# Altium PCB WRIP.PcbDoc
Units mm, origin at the board's own origin, x right, y up, seen from the top; angles counter-clockwise.
Board outline 36.1 x 23.75 mm, 2 copper layers (F.Cu, B.Cu), stack 2.683 mm thick; 24 components, 17 nets, 90 pads, 21 vias.
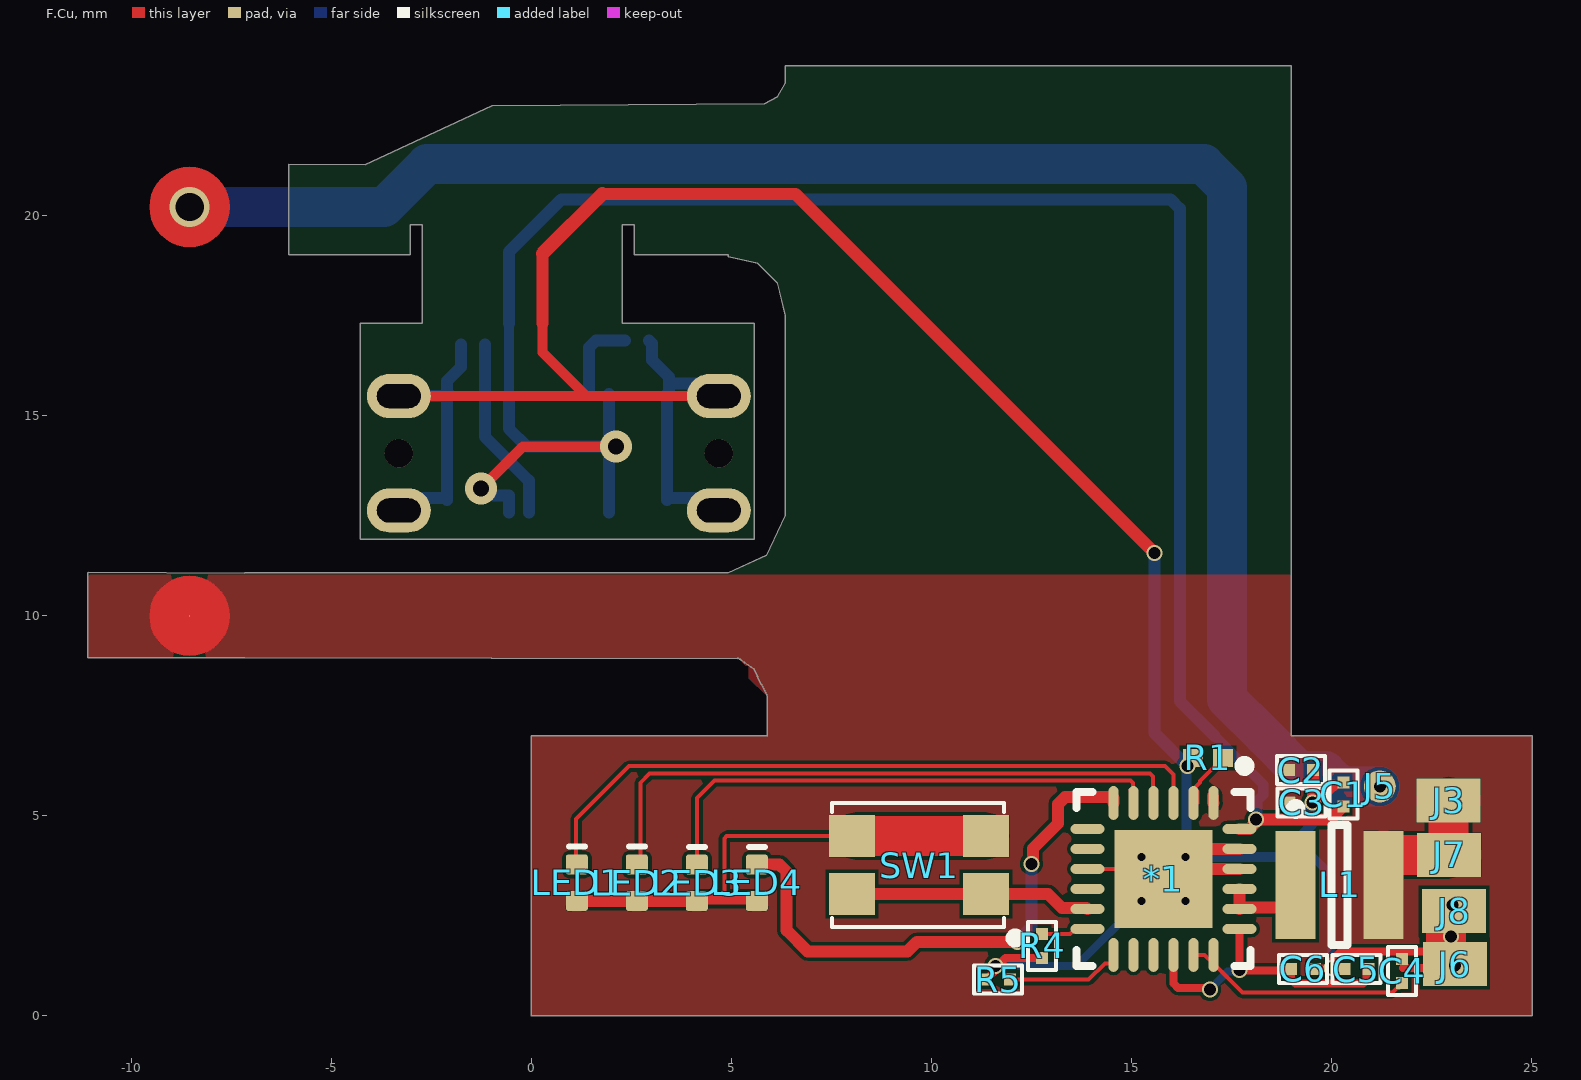
[diagram p0: F.Cu view]
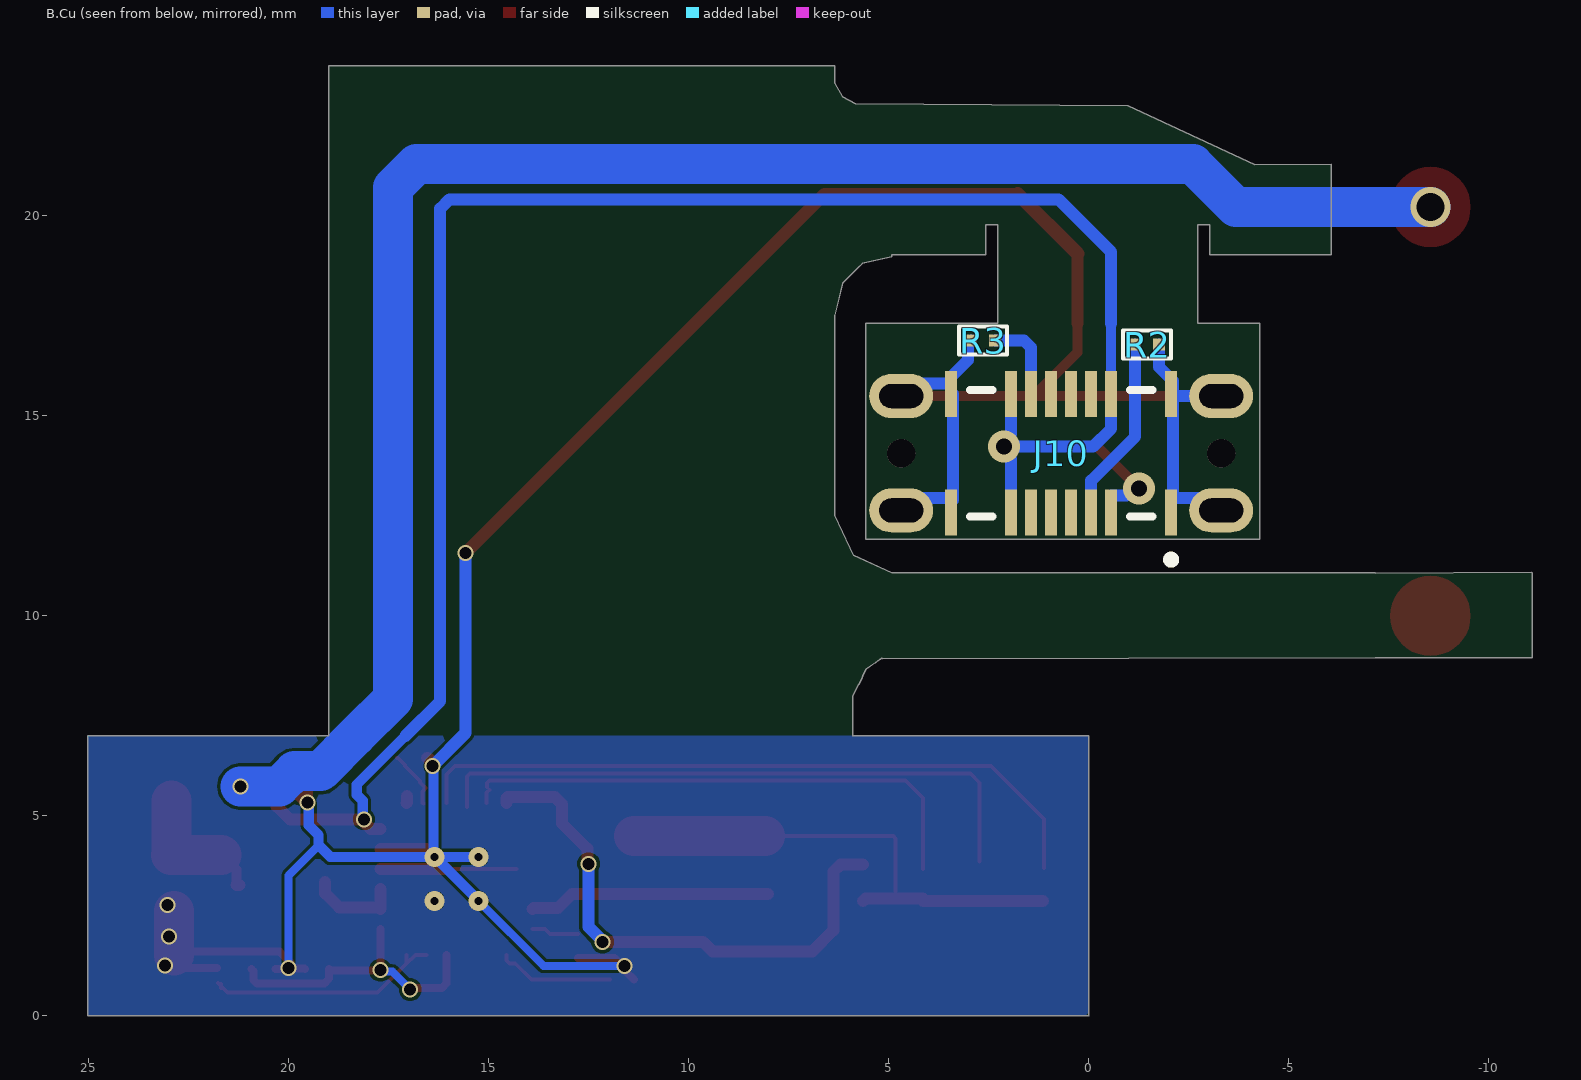
[diagram p1: B.Cu view, seen from below]
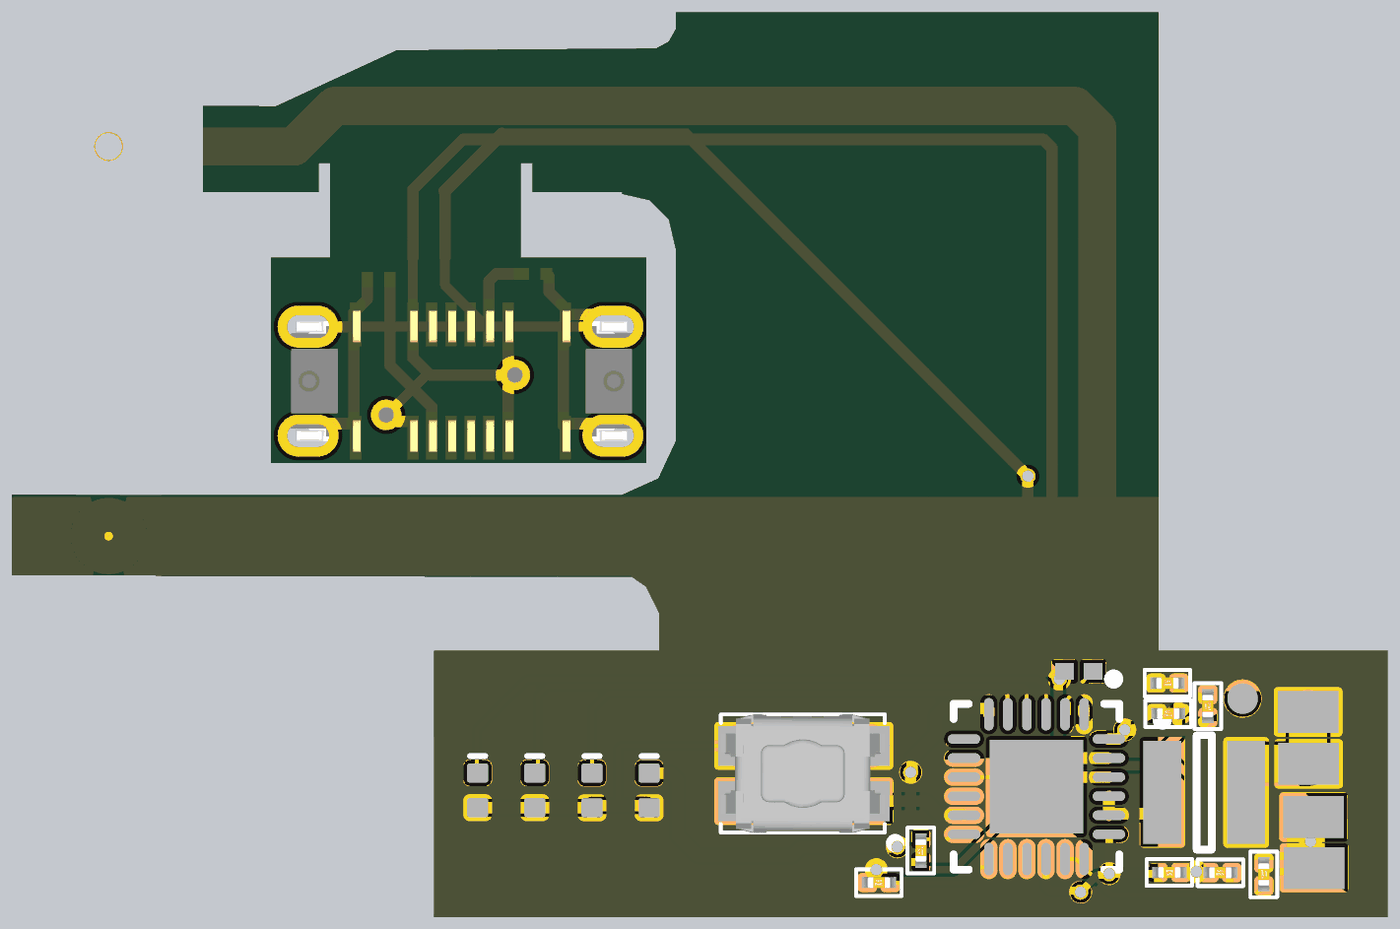
[diagram p2: 3D render of the assembled board from above, using the file's embedded part models]
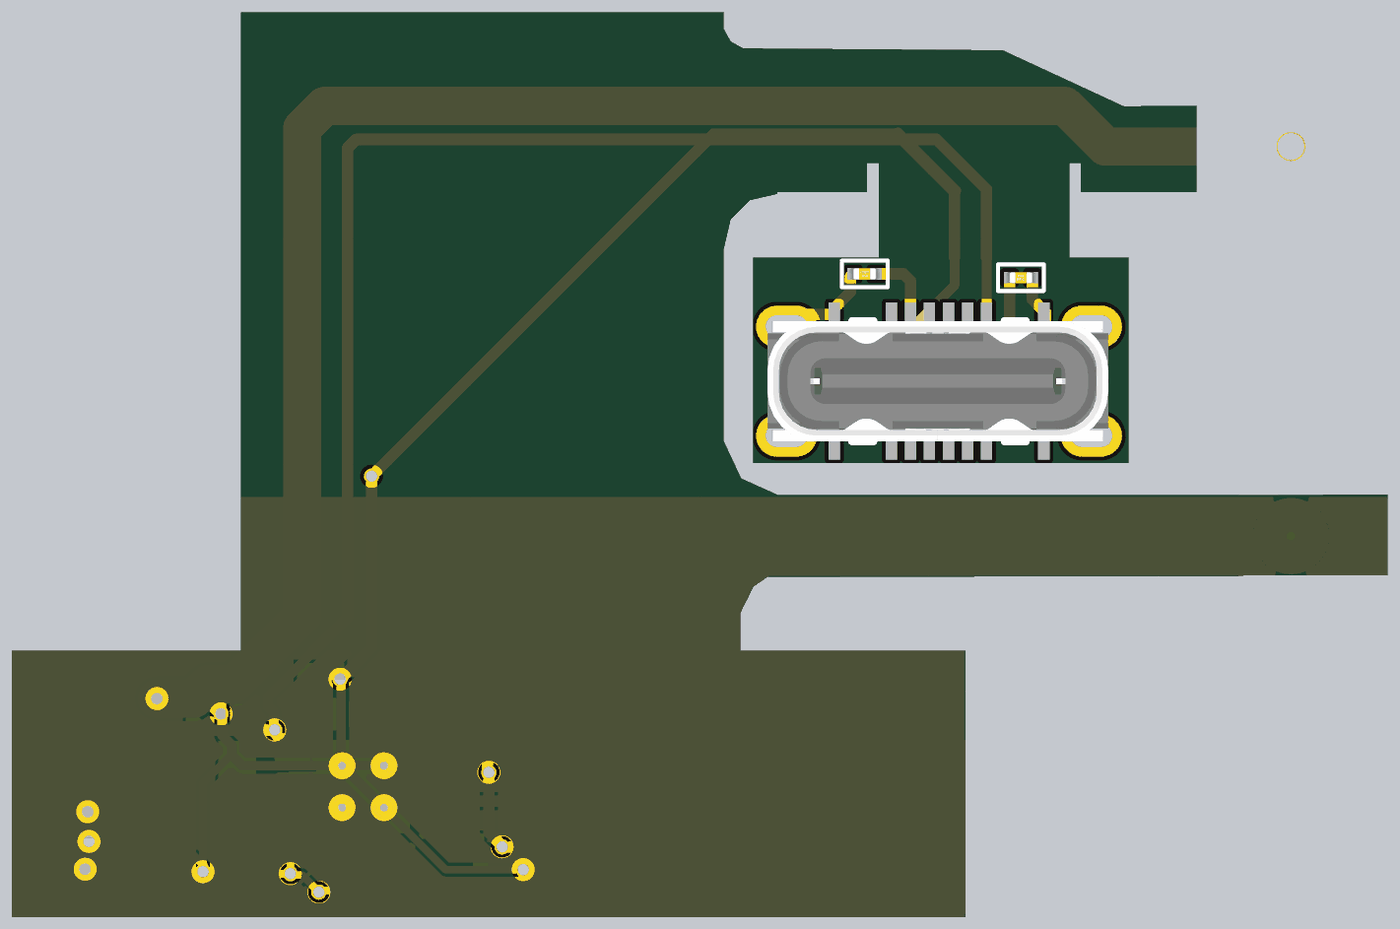
[diagram p3: 3D render of the assembled board from below, using the file's embedded part models]

## Layer stack, top to bottom
Stiffener 3: core 1.2, FR4, Dk 4.5
Top pi Coverlay: solder mask 0.0125, FC-001, Dk 4
Adhesive 1: prepreg 0.015, PP-006, Dk 4.1
F.Cu: signal copper 0.018
polyamide: core 0.025, Core-009, Dk 4.5
B.Cu: signal copper 0.018
Adhesive 4: prepreg 0.015, PP-006, Dk 4.1
bottom pi layer: solder mask 0.0125, FC-001, Dk 4
Adhesive 6: prepreg 0.0711, PP-006, Dk 4.1
Adhesive 5: prepreg 0.0711, PP-006, Dk 4.1
Stiffener 2: core 1.2, FR4, Dk 4.5
Stiffener 1: core 0.05, Core-009, Dk 4.5

## Board outline
-7.16,8.953 -7.16,8.952 5.155,8.929 5.174,8.941 5.326,8.834 5.558,8.675 5.619,8.559 5.69,8.403 5.748,8.291 5.896,7.993 5.9,7 0,7 0,0 0.001,-0.001 25.018,-0.001 25.018,6.999 19.002,6.999 19.002,23.74 18.994,23.748 6.343,23.748 6.343,23.315 6.155,22.979 5.827,22.8 -0.978,22.751 -4.153,21.282 -6.066,21.288 -6.066,19.03 -3.031,19.024 -3.031,19.784 -2.727,19.784 -2.73,19.781 -2.73,17.31 -4.282,17.31 -4.282,11.915 5.571,11.915 5.571,17.31 2.271,17.31 2.273,17.312 2.273,19.784 2.577,19.784 2.577,19.024 4.928,19.024 4.928,18.981 5.658,18.813 5.779,18.693 6.155,18.317 6.343,17.517 6.343,12.501 5.879,11.513 4.924,11.082 -7.16,11.082 -7.16,11.073 -11.072,11.094 -11.083,11.083 -11.083,8.953
board region "Layer Stack Region 5": 0,7 0,0 0.001,-0.001 25.018,-0.001 25.018,6.999
board region "Layer Stack Region 3": -4.282,11.915 5.571,11.915 5.571,17.31 -4.282,17.31
board region "Layer Stack Region 1": -9.861,19.059 -6.067,19.029 -6.067,21.287 -9.846,21.321 -9.861,21.306
board region "Layer Stack Region 4": -11.083,8.953 -7.16,8.953 -7.16,11.073 -11.072,11.094 -11.083,11.083
board region "Layer Stack Region 2": -7.16,8.953 -7.16,8.952 5.155,8.929 5.174,8.941 5.326,8.834 5.558,8.675 5.619,8.559 5.69,8.403 5.748,8.291 5.896,7.993 5.9,7 19.002,6.999 19.002,23.74 18.994,23.748 6.343,23.748 6.343,23.315 6.155,22.979 5.827,22.8 -0.978,22.751 -4.153,21.282 -6.066,21.288 -6.066,19.03 -3.031,19.024 -3.031,19.784 -2.727,19.784 -2.73,19.781 -2.73,17.31 2.271,17.31 2.273,17.312 2.273,19.784 2.577,19.784 2.577,19.024 4.928,19.024 4.928,18.981 5.659,18.813 5.779,18.693 6.155,18.317 6.343,17.517 6.343,12.501 5.879,11.513 4.924,11.082 -7.16,11.082 -7.16,11.073

## Design rules (kind name [scope] priority, off if disabled: settings)
Clearance [All] p1: gap=0.08 ignorepadtopadclearanceinfootprint=TRUE
Clearance "Clearence 0.5_Polygon" [InNamedPolygon('F.Cu-/vbat') OR InNamedPolygon('B.Cu-GND')] p2: gap=0.5 ignorepadtopadclearanceinfootprint=FALSE
MinimumSolderMaskSliver [All] p1: minsoldermaskwidth=0
PolygonConnect Polygon_B.Cu-GND_ConnectDirect [IsNamedPolygon('B.Cu-GND') vs IsVia] p1: connectstyle=Direct reliefconductorwidth=0.254 reliefentries=4 polygonreliefangle="90 Angle" airgapwidth=0.254
PolygonConnect Polygon_B.Cu-GND_ConnectRelief45 [IsNamedPolygon('B.Cu-GND') vs (IsThruPin or IsSMTPin) and (PadShape_AllLayers = 'Round')] p2: connectstyle=Relief reliefconductorwidth=0.5 reliefentries=4 polygonreliefangle="45 Angle" airgapwidth=0.5
PolygonConnect Polygon_B.Cu-GND_ConnectRelief90 [IsNamedPolygon('B.Cu-GND') vs (IsThruPin or IsSMTPin) and (PadShape_AllLayers <> 'Round')] p3: connectstyle=Relief reliefconductorwidth=0.5 reliefentries=4 polygonreliefangle="90 Angle" airgapwidth=0.5
PolygonConnect Polygon_F.Cu-/vbat_ConnectDirect [IsNamedPolygon('F.Cu-/vbat') vs IsVia] p4: connectstyle=Direct reliefconductorwidth=0.254 reliefentries=4 polygonreliefangle="90 Angle" airgapwidth=0.254
PolygonConnect Polygon_F.Cu-/vbat_ConnectRelief45 [IsNamedPolygon('F.Cu-/vbat') vs (IsThruPin or IsSMTPin) and (PadShape_AllLayers = 'Round')] p5: connectstyle=Relief reliefconductorwidth=0.5 reliefentries=4 polygonreliefangle="45 Angle" airgapwidth=0.5
PolygonConnect Polygon_F.Cu-/vbat_ConnectRelief90 [IsNamedPolygon('F.Cu-/vbat') vs (IsThruPin or IsSMTPin) and (PadShape_AllLayers <> 'Round')] p6: connectstyle=Relief reliefconductorwidth=0.5 reliefentries=4 polygonreliefangle="90 Angle" airgapwidth=0.5
RoutingVias [All] p1: holewidth=0.3 width=0.5 viastyle="Through Hole" minholewidth=0.2 minwidth=0.35 maxholewidth=0.5 maxwidth=0.6
SilkToSilkClearance [All] p1: silktosilkclearance=0
SilkToSolderMaskClearance [IsPad] p1: minsilkscreentomaskgap=0 clearancetoexposedcopper=TRUE
SolderMaskExpansion [All] p1: expansion=0.102 istentingtop=FALSE
Width [All] p1: maxlimit=10 minlimit=0.1 preferedwidth=0.2 substack1={7D010D5B-84C1-4AC7-9AD1-ABD5FE375354} toplayer_{7d010d5b-84c1-4ac7-9ad1-abd5fe375354}_minwidth=0.254 toplayer_{7d010d5b-84c1-4ac7-9ad1-abd5fe375354}_maxwidth=0.254 toplayer_{7d010d5b-84c1-4ac7-9ad1-abd5fe375354}_prefwidth=0.254 bottomlayer_{7d010d5b-84c1-4ac7-9ad1-abd5fe375354}_minwidth=0.254 bottomlayer_{7d010d5b-84c1-4ac7-9ad1-abd5fe375354}_maxwidth=0.254 bottomlayer_{7d010d5b-84c1-4ac7-9ad1-abd5fe375354}_prefwidth=0.254 substack2={79D6D557-E508-46BB-873F-1E1BBE01896B} toplayer_{79d6d557-e508-46bb-873f-1e1bbe01896b}_minwidth=0.254 toplayer_{79d6d557-e508-46bb-873f-1e1bbe01896b}_maxwidth=0.254 toplayer_{79d6d557-e508-46bb-873f-1e1bbe01896b}_prefwidth=0.254 bottomlayer_{79d6d557-e508-46bb-873f-1e1bbe01896b}_minwidth=0.254 bottomlayer_{79d6d557-e508-46bb-873f-1e1bbe01896b}_maxwidth=0.254 bottomlayer_{79d6d557-e508-46bb-873f-1e1bbe01896b}_prefwidth=0.254 substack3={56950D37-EDBD-443D-88D3-3E324AC749C8} checkconnectedcopper=TRUE
27 further rules are at their usual default settings.

## Components (designator, comment, footprint, x,y, rotation, side; value= is the part's Value field where it differs from the comment)
*1 "rt9480" QFN50P400X400X80_HS-25N 15.803,3.425 r270 top
C1 "Capacitor" C0201 20.299,5.541 r90 top value=1uf
C2 "Capacitor" C0201 19.24,6.142 r0 top value=10uf
C3 "Capacitor" C0201 19.259,5.341 r0 top value=10uf
C4 "Capacitor" C0201 21.769,1.123 r270 top value=1uf
C5 "Capacitor" C0201 20.628,1.168 r0 top value=22uf
C6 "Capacitor" C0201 19.29,1.175 r180 top value=22uf
J3 "PAD_AWG_22" PAD_0.4X0.6#1 22.931,5.387 r180 bottom
J5 "PAD_AWG_22" PAD_0.4X0.6#2 21.211,5.737 r270 bottom
J6 "PAD_AWG_22" PAD_0.4X0.6#1 23.087,1.293 r180 bottom
J7 "PAD_AWG_22" PAD_0.4X0.6#1 22.944,4.026 r180 bottom
J8 "PAD_AWG_22" PAD_0.4X0.6#3 23.072,2.627 r180 top
J10 "USB4145-03-0070-C_REVA2" GCT_USB4145-03-0070-C_REVA2 0.69,14.067 r0 bottom
L1 "SRN3015-1R0Y" BOUR-SRN3015-2_V 20.206,3.274 r0 top
LED1 "QBLP595-IB" QTB-QBLP595_V 1.14,3.33 r270 top
LED2 "QBLP595-IB" QTB-QBLP595_V 2.64,3.33 r270 top
LED3 "QBLP595-IB" QTB-QBLP595_V 4.14,3.327 r270 top
LED4 "QBLP595-IB" QTB-QBLP595_V 5.64,3.327 r270 top
R1 "10K NTC" RESC1005X40X25LL05T10 16.915,6.45 r180 top
R2 "Resistor" R0201 -1.46,16.782 r180 bottom value=5.1K
R3 "Resistor" R0201 2.64,16.882 r0 bottom value=5.1k
R4 "Resistor" R0201 12.769,1.75 r90 top value=100k
R5 "Resistor" R0201 11.668,0.908 r0 top value=100k
SW1 "SPST-NO" EVPAA802Q 11.371,3.046 r180 top

## Footprints (in the part's own frame and the unit in brackets; to place one, negate y for a bottom-side part, rotate by r counter-clockwise, add the part's x,y. Pads: shape width x height; smd on the part's side, far side on the other; paste and mask are expansions set on the pad)
BOUR-SRN3015-2_V [mm] "SMD, 2-Leads, Body 3x3mm, Height 1.5mm"
  rect 1x2.7 smd: 1(-1.1,0) 2(1.1,0)
  silkscreen extent -1.22,-1.5 0.2,2.02, body extent -1.5,-1.5 1.5,1.5, height 1.5
C0201 [mm]
  rect 0.3x0.3 smd: 1(-0.3,0) 2(0.3,0)
  silkscreen extent -0.6,-0.35 0.6,0.35, body extent -0.44,-0.15 0.44,0.15, height 0.31
EVPAA802Q [mm] "SW-SPST"
  rect 1.15x1.05 smd: 1(0,0) 2(0,-1.45) 3(3.35,0) 4(3.35,-1.45)
  silkscreen extent -0.84,-2.27 3.85,1.21, body extent -0.45,-2.27 3.85,0.83, height 1.7
GCT_USB4145-03-0070-C_REVA2 [mm]
  rect 0.3x1.15 smd: A1(-2.75,1.485) A4(-1.25,1.485) A5(-0.75,1.485) A6(-0.25,1.485) A7(0.25,1.485) A8(0.75,1.485) A9(1.25,1.485) A12(2.75,1.485) B1(2.75,-1.485) B4(1.25,-1.485) B5(0.75,-1.485) B6(0.25,-1.485) B7(-0.25,-1.485) B8(-0.75,-1.485) B9(-1.25,-1.485) B12(-2.75,-1.485)
  oval 1.6x1.1 hole 0.6 slot 1.1 at 0 deg: S1(-4,1.43) S2(4,1.43) S3(-4,-1.43) S4(4,-1.43)
  round 0.71 hole 0.71 unplated: ""(-4,0) ""(4,0)
  silkscreen extent -2.85,-1.58 2.28,2.76, body extent -4.44,-1.85 4.5,1.84, height 7.24
PAD_0.4X0.6#1 [mm] "FOR AWG 22 WIRE"
  rect 1.6x1.1 smd far side: 1(0,0)
PAD_0.4X0.6#2 [mm] "FOR AWG 22 WIRE"
  round 0.8 smd far side: 1(0,0)
PAD_0.4X0.6#3 [mm] "FOR AWG 22 WIRE"
  rect 1.6x1.1 smd: 1(0,0)
QFN50P400X400X80_HS-25N [mm] "QFN, 24-Leads, Body 4.00x4.00mm, Pitch 0.50mm, Thermal Pad 2.45x2.45mm, IPC Medium Density"
  oval 0.85x0.25 smd: 1(-1.9,1.25) 2(-1.9,0.75) 3(-1.9,0.25) 4(-1.9,-0.25) 5(-1.9,-0.75) 6(-1.9,-1.25) 13(1.9,-1.25) 14(1.9,-0.75) 15(1.9,-0.25) 16(1.9,0.25) 17(1.9,0.75) 18(1.9,1.25)
  oval 0.25x0.85 smd: 7(-1.25,-1.9) 8(-0.75,-1.9) 9(-0.25,-1.9) 10(0.25,-1.9) 11(0.75,-1.9) 12(1.25,-1.9) 19(1.25,1.9) 20(0.75,1.9) 21(0.25,1.9) 22(-0.25,1.9) 23(-0.75,1.9) 24(-1.25,1.9)
  rect 2.45x2.45 smd: 25(0,0)
  silkscreen extent -2.95,-2.18 2.18,2.17, body extent -2.02,-2.03 2.03,2.02, height 0.8
QTB-QBLP595_V [mm] "SMD, 2-Leads, Body 1x0.5mm"
  rrect25% 0.5x0.55 smd: 1(-0.455,0) 2(0.455,0)
  silkscreen extent -0.9,-0.2 -0.9,0.2, body extent -0.5,-0.25 0.5,0.25, height 0.5
R0201 [mm]
  rect 0.3x0.3 smd: 1(-0.3,0) 2(0.3,0)
  silkscreen extent -0.6,-0.35 0.6,0.35, body extent -0.44,-0.15 0.44,0.15, height 0.31
RESC1005X40X25LL05T10 [mm] "Chip Resistor, 2-Leads, Body 1.00x0.50mm, IPC High Density"
  rect 0.5x0.45 smd: 1(-0.375,0) 2(0.375,0)
  body extent -0.53,-0.27 0.53,0.28, height 0.4

## Part data
*1: library part CMP-019-00049-1, "power supply lipo"
J3 J5 J6 J7 J8: library part TP_25MILC_1, "Pad for solder awg 22 wire"
J10: library part CMP-007-000000-2, "Type C USB 2.0 Connector", Package=None, Availability="In Stock", Check_prices=https://www.snapeda.com/parts/USB4145-03-0070-C/Global+Connector+Technology/view-part/?ref=eda, Component Type=Standard, Design Item ID=USB4145-03-0070-C_REVA2, MF="Global Connector Technology", MP=USB4145-03-0070-C, Pin Count=20, Price=None, Purchase-URL=https://pricing.snapeda.com/search/part/USB4145-03-0070-C/?ref=eda, SnapEDA_Link=https://www.snapeda.com/parts/USB4145-03-0070-C/Global+Connector+Technology/view-part/?ref=snap, Source=USB4145-03-0070-C_REVA2.SchLib
L1: library part CMP-0007-00007-1, "Semi-shielded Power Inductor, 1 uH, +/- 30%, 2.35 A, -40 to 125 degC, 3 x 3 x 1.5 mm SMD, RoHS and Halogen Free, Tape and Reel", Inductance="1 uH", Inductance Tolerance="+/- 30%", Manufacturer=Bourns, Operating Temperature="-40 to 125 degC", Rated current="2.35 A", Resistance to Solder Heat="+260 degC for 10 sec.", ComponentLink1Description="Manufacturer URL", ComponentLink1URL=http://www.bourns.com/, ComponentLink2Description=Datasheet, ComponentLink2URL=http://www.bourns.com/data/global/pdfs/SRN3015.pdf, ComponentLink3Description="Package Specification", ComponentLink3URL=http://www.bourns.com/data/global/pdfs/SRN3015.pdf, DatasheetVersion=Aug-11, DCR Max="0.048 Ohm", Isat="2.35 A", Mounting Technology="Surface Mount", PackageDescription="2-Pin SMD, Body 3 x 3 mm, Height 1.5 mm", PackageReference=SRN3015, Packing="Tape and Reel", PartNumber=SRN3015-1R0Y, RoHS=TRUE, SRF Min="145 MHz"
LED1 LED2 LED3 LED4: library part CMP-007-00042-3, "Chip LED 0402, Blue, 0.02 A, 3.1 to 3.7 V, -40 to 80 degC, 2-Pin SMD, RoHS, Tape and Reel", Case/Package=0402, Colour=Blue, Mounting Technology=SMT, Pins=2, RoHS Compliant=Yes
R1: library part CMP-2002-07540-1, Manufacturer=Yageo, Part Number=RC0402FR-0725K5L
SW1: library part EVPAA802Q, "SWITCH TACTILE SPST-NO 0.02A 15V", Actuator Color=Grey, Case/Package=SMD/SMT, Color=Black, Contact Resistance=100mR, Current Rating=50mA, Manufacturer=Panasonic, Max Operating Temperature=85°C, Max Voltage Rating (DC)=15V, Min Operating Temperature=-40°C, Operating Force=5N, Package Quantity=1, Supplier Part Number 1=P15198CT-ND, Voltage Rating (DC)=12V, Actuator Length=0.3mm, Actuator Type=Standard, ComponentLink1Description=http://www.mouser.com/ds/2/315/ATK0000PE192-72254.pdf?src-supplier=Mouser, ComponentLink1URL=http://www.mouser.com/ds/2/315/ATK0000PE192-72254.pdf?src-supplier=Mouser, ComponentLink2Description=http://industrial.panasonic.com/www-data/pdf/ATK0000/ATK0000CE26.pdf?src-supplier=Future+Electronics, ComponentLink2URL=http://industrial.panasonic.com/www-data/pdf/ATK0000/ATK0000CE26.pdf?src-supplier=Future+Electronics, ComponentLink3Description=https://industrial.panasonic.com/ac/cdn/e/control/switch/light-touch/catalog/sw_lt_eng_package.pdf?src-supplier=Digi-Key, ComponentLink3URL=https://industrial.panasonic.com/ac/cdn/e/control/switch/light-touch/catalog/sw_lt_eng_package.pdf?src-supplier=Digi-Key, ComponentLink4Description=https://industrial.panasonic.com/ac/cdn/e/control/switch/light-touch/catalog/sw_lt_eng_3529s.pdf?src-supplier=Digi-Key, ComponentLink4URL=https://industrial.panasonic.com/ac/cdn/e/control/switch/light-touch/catalog/sw_lt_eng_3529s.pdf?src-supplier=Digi-Key, Contact Plating=Silver, Electrical Life=100000Cycles, Height=0.7mm, Illumination Type=Non-Illuminated, Manufacturer Part Number=EVPAA802Q, Mechanical Life=100000Cycles, Mount="Surface Mount", Orientation=Straight, Packaging="Tape and Reel", Pricing 1="1=0.79, 10=0.762, 25=0.7324, 100=0.6356, 250=0.58, 500=0.5389, 1000=0.4833, 2500=0.454 (USD)", Radiation Hardening=No, Series=EVPAA, Size=2.9mm, Stock 1=0, Supplier 1=Digi-Key, Switch Function=Off-Mom, Switch Travel=0.15mm, Termination="Gull Wing", Throw Configuration=SPST
C1 C2 C3 C4 C5 C6: SimulationGenericComponent=True
R2 R3 R4 R5: SimulationGenericComponent=True, TC1=0, TC2=0

## Free pads (board coordinates)
  round 0.025 smd: 6(-8.544,10.001) 6(-8.544,20.223)

## Via types
v1: diameter 0.4, hole 0.3, F.Cu to B.Cu, 14 vias
v2: diameter 0.5, hole 0.2, F.Cu to B.Cu, 4 vias
v3: diameter 0.8, hole 0.4, F.Cu to B.Cu, 2 vias
v4: diameter 1, hole 0.711, F.Cu to B.Cu, 1 vias

## Nets (pads, with @x,y where several pads share a name; then routed paths per layer and width w, separated by ;. In a path a pad name is that pad's centre, name@x,y a point inside that pad or via, vN(x,y) a via of type N, cw(c..) or ccw(c..) an arc to the next point about the centre after c; other vN are vias at no path point)
GND: *1.9 *1.22 *1.23 *1.25 C1.2 C2.2 C3.2 C4.1 C5.1 C6.1 J6.1 J8.1 J10.A1 J10.A12 J10.B1 J10.B12 J10.S1 J10.S2 J10.S3 J10.S4 R1.2 R2.2 R3.2 R4.1 R5.1 | length 81.9
  F.Cu w0.1: *1.9@14.303,3.675 *1.25@15.953,3.675
  F.Cu w0.2: R5.1 11.561,1.101 11.561,1.21 v1(11.599,1.248) 11.653,1.248 11.855,1.45 R4.1 ; C6.1 19.599,1.184 19.992,1.184 v1(20.002,1.194) ; C5.1 20.325,1.172 19.959,1.172 19.959,1.33 20.236,1.607 22.773,1.607 22.867,1.513 22.551,1.197 21.789,1.197
  F.Cu w0.254: J10.S3 1.373,15.497 ; 0.281,17.31 0.281,16.589 1.373,15.497 ; J10.S4 1.373,15.497
  F.Cu w0.3: 0.281,17.31 0.281,19.057 ; 1.773,20.549 6.604,20.549 v1(15.579,11.574) ; *1.25@16.053,3.675 *1.22 ; v2(16.353,3.975) 16.553,4.175 *1.23 ; v1(16.405,6.246) 16.424,6.265 16.424,6.335 16.44,6.35 16.44,6.375 16.515,6.45 R1.2 ; v1(19.528,5.337) C3.2@19.545,5.355 ; C2.2 19.54,5.361 C3.2@19.545,5.355 ; 20.038,5.765 19.814,5.542 19.759,5.542 C3.2 C3.2@19.545,5.355
  F.Cu w0.34: 0.281,19.057 1.773,20.549
  F.Cu w1: J6.1@22.867,1.513 J8.1@22.867,2.623
  B.Cu w0.2: v1(11.599,1.248) 13.626,1.248 v2(15.253,2.875) ; 19.253,4.263 20.002,3.514 v1(20.002,1.194)
  B.Cu w0.254: v2(15.253,2.875) v2(16.353,3.975) ; v2(15.253,3.975) v2(16.353,3.975) ; v1(16.405,6.246) 16.379,6.22 16.379,4.001 v2(16.353,3.975) ; v1(19.528,5.337) 19.5,5.309 19.5,4.764 19.253,4.517 19.253,4.263 18.965,3.975 v2(16.353,3.975)
  B.Cu w0.3: J10.S1@-3.36,12.952 J10.A1@-2.11,12.952 ; J10.S3 J10.B12@-2.11,15.497 ; J10.A1@-2.11,12.897 J10.A1@-2.11,12.952 ; J10.B12@-2.11,15.552 -2.11,15.867 -1.76,16.217 R2.2 ; J10.B12 -2.06,15.497 J10.B12@-2.11,15.497 ; R3.2 3.016,16.806 3.016,16.402 3.44,15.977 J10.B1@3.44,15.812 ; J10.A12@3.39,12.897 J10.A12@3.39,12.952 ; J10.B1@3.39,15.552 J10.A12@3.39,12.952 ; J10.B1 J10.B1@3.44,15.812 ; J10.S2@4.64,12.952 J10.A12@3.39,12.952 ; J10.S4@4.64,15.812 J10.B1@3.44,15.812 ; v1(15.579,11.574) 15.579,7.072 v1(16.405,6.246) ; J10.A1@-2.11,12.952 J10.B12@-2.11,15.497
  other v1: 23.094,1.259 22.994,1.989 23.028,2.769
  other v2: 16.353,2.875
j4: J5.1 pad.6@-8.544,20.223 | length 44.1
  B.Cu w1: v4(-8.544,20.223) -3.677,20.223 -2.608,21.292 16.811,21.292 17.397,20.706 17.397,7.921 18.319,7 19.201,6.117 19.851,6.117 20.231,5.737 v1(21.211,5.737)
Net*1_2: *1.2 R1.1 | length 1.5
  F.Cu w0.1: *1.2@16.63,5.306 16.636,5.306 16.655,5.325 16.655,5.615 16.576,5.694 16.581,5.694 16.718,5.831 16.718,5.878 17.09,6.25 17.09,6.275 17.265,6.45 R1.1
Net*1_3: *1.3 LED1.1 | length 17.5
  F.Cu w0.1: LED1.1@1.121,3.703 1.121,4.925 2.439,6.243 15.843,6.243 16.053,6.033 *1.3
Net*1_4: *1.4 LED2.1 | length 15.7
  F.Cu w0.1: LED2.1@2.726,3.865 2.726,5.829 2.96,6.063 15.462,6.063 15.54,5.985 *1.4@15.54,5.218
Net*1_5: *1.5 LED3.1 | length 13.3
  F.Cu w0.1: LED3.1@4.142,3.676 4.142,5.449 4.576,5.883 14.981,5.883 15.04,5.825 *1.5@15.04,5.728 ; *1.5@14.983,5.654 15.053,5.585 *1.5
Net*1_6: *1.6 LED4.1 | length 13.7
  F.Cu w0.3: LED4.1 6.206,3.782 6.382,3.606 6.382,2.139 6.91,1.611 9.4,1.611 9.636,1.847 v1(12.153,1.847) ; v1@12.536,3.897 12.536,4.181 13.17,4.815 13.17,5.297 13.346,5.473 14.528,5.473 14.553,5.448 *1.6
  B.Cu w0.3: v1(12.153,1.847) 12.153,1.874 12.501,2.222 v1(12.501,3.802)
Net*1_11: *1.11 SW1.1 SW1.3 | length 6
  F.Cu w0.3: SW1.3 12.92,3.046 13.265,2.7 13.878,2.7 *1.11
Net*1_12: *1.12 R4.2 | length 1.2
  F.Cu w0.1: R4.2 13.469,2.05 13.594,2.175 *1.12
Net*1_13: *1.13 R5.2 | length 2.9
  F.Cu w0.1: R5.2 13.933,0.908 14.336,1.311 14.483,1.311 14.553,1.38 *1.13
Net*1_16: *1.16 *1.19 C5.2 C6.2 | length 7.4
  F.Cu w0.2: *1.16 16.053,0.816 16.17,0.699 16.922,0.699 v1(16.962,0.659) ; *1.19 17.711,2.167 v1(17.711,1.143) ; v1@17.711,1.139 C6.2@18.94,1.139 ; C6.2 18.99,0.931 19.107,0.814 20.793,0.814 20.878,0.899 20.878,1.118 C5.2
  B.Cu w0.2: v1(16.962,0.659) 17.408,1.105 17.672,1.105 v1(17.711,1.143)
Net*1_17: *1.17 *1.18 C4.2 | length 6
  F.Cu w0.1: *1.17 16.834,1.525 *1.18@17.053,1.306 ; *1.18 *1.18@17.053,1.306 ; C4.2@21.666,0.72 21.53,0.584 17.775,0.584 *1.18@17.053,1.306 ; C4.2@21.689,0.697 C4.2@21.689,0.798 ; C4.2@21.716,0.771 C4.2
Net*1_20: *1.20 *1.21 L1.1 | length 2.3
  F.Cu w0.3: *1.20 *1.21 ; *1.20@17.757,2.714 18.74,2.714 19.09,3.064 L1.1@19.09,3.342
Net*1_24: *1.24 C1.1 J10.A4 J10.A9 J10.B4 J10.B9 | length 51.8
  F.Cu w0.254: v3(-1.26,13.182) -0.212,14.231 v3(2.117,14.231)
  F.Cu w0.3: *1.24 17.953,4.675 v1@18.127,4.849 ; v1(18.12,4.916) 18.129,4.907 19.965,4.907 C1.1
  B.Cu w0.254: J10.B9 -0.56,17.31 ; 17.084,6.999 18.299,5.784 18.299,5.53 18.148,5.379 18.148,4.944 v1(18.12,4.916)
  B.Cu w0.3: v3(-1.26,13.182) -1.125,13.182 -0.95,13.007 -0.56,13.007 J10.A4 ; J10.B9 -0.56,14.682 -0.109,14.231 v3(2.117,14.231) ; -0.56,17.31 -0.56,19.098 0.753,20.411 15.982,20.411 16.213,20.18 16.213,7.87 17.084,6.999 ; J10.A9 1.94,13.918 2.117,14.095 v3(2.117,14.231) ; J10.B4 1.94,14.544 2.117,14.366 v3(2.117,14.231)
NetJ10_A5: J10.A5 R2.1 | length 4.7
  B.Cu w0.3: R2.1 -1.16,14.482 -0.06,13.382 J10.A5
NetJ10_B5: J10.B5 R3.1 | length 2.1
  B.Cu w0.3: J10.B5 1.44,16.706 1.616,16.882 R3.1
VCC: *1.1 C2.1 C3.1 J3.1 J7.1 L1.2 LED1.2 LED2.2 LED3.2 LED4.2 pad.6@-8.544,10.001 SW1.2 SW1.4 | length 16.3
  F.Cu w0.1: 4.826,2.931 4.826,4.437 4.885,4.496 SW1.4
  F.Cu w0.254: *1.1@17.053,5.488 *1.1@17.055,5.49 ; L1.2 21.306,3.653 L1.2@21.679,4.026 ; J7.1@22.931,4.039 J7.1
  F.Cu w0.3: LED1.2 1.143,2.872 LED3.2 ; LED3.2@4.14,2.931 4.826,2.931 5.581,2.931 LED4.2 ; *1.1@17.043,5.503 17.043,5.335 *1.1 ; L1.2@21.23,3.274 L1.2
  F.Cu w1: SW1.4@8.096,4.496 SW1.2 ; L1.2@21.679,4.026 J7.1 ; J7.1@22.931,4.039 J3.1
pads on no net: *1.7 *1.8 *1.10 *1.14 *1.15 J10. J10.A6 J10.A7 J10.A8 J10.B6 J10.B7 J10.B8

## Polygon pours and split planes (outlines as drawn)
no net on Layer0 "Default Coverlay 3 Top" (split plane): -11.083,8.953 -7.16,8.953 -7.16,11.073 -11.072,11.094 -11.083,11.083
no net on Layer0 "Default Coverlay 3 Top" (split plane): -9.861,19.059 -6.067,19.029 -6.067,21.287 -9.846,21.321 -9.861,21.306
no net on Layer0 "Default Coverlay 3 Bottom" (split plane): -11.083,8.953 -7.16,8.953 -7.16,11.073 -11.072,11.094 -11.083,11.083
no net on Layer0 "Default Coverlay 3 Bottom" (split plane): -9.861,19.059 -6.067,19.029 -6.067,21.287 -9.846,21.321 -9.861,21.306
no net on Layer0 "Default Coverlay 2 Top" (split plane): -7.16,8.953 -7.16,8.952 5.155,8.929 5.174,8.941 5.326,8.834 5.558,8.675 5.619,8.559 5.69,8.403 5.748,8.291 5.896,7.993 5.9,7 19.002,6.999 19.002,23.74 18.994,23.748 6.343,23.748 6.343,23.315 6.155,22.979 5.827,22.8 -0.978,22.751 -4.153,21.282 -6.06,21.282 -6.06,19.024 -3.031,19.024 -3.031,19.784 -2.727,19.784 -2.73,19.781 -2.73,17.31 2.271,17.31 2.273,17.312 2.273,19.784 2.577,19.784 2.577,19.024 4.928,19.024 4.928,18.981 5.659,18.813 5.779,18.693 6.155,18.317 6.343,17.517 6.343,12.501 5.879,11.513 4.924,11.082 -7.16,11.082 -7.16,11.073
no net on Layer0 "Default Coverlay 2 Bottom" (split plane): -7.16,8.953 -7.16,8.952 5.155,8.929 5.174,8.941 5.326,8.834 5.558,8.675 5.619,8.559 5.69,8.403 5.748,8.291 5.896,7.993 5.9,7 19.002,6.999 19.002,23.74 18.994,23.748 6.343,23.748 6.343,23.315 6.155,22.979 5.827,22.8 -0.978,22.751 -4.153,21.282 -6.06,21.282 -6.06,19.024 -3.031,19.024 -3.031,19.784 -2.727,19.784 -2.73,19.781 -2.73,17.31 2.271,17.31 2.273,17.312 2.273,19.784 2.577,19.784 2.577,19.024 4.928,19.024 4.928,18.981 5.659,18.813 5.779,18.693 6.155,18.317 6.343,17.517 6.343,12.501 5.879,11.513 4.924,11.082 -7.16,11.082 -7.16,11.073
no net on Layer0 "Default Coverlay 1 Top" (split plane): -6.066,21.288 -4.153,21.282 -0.978,22.751 5.827,22.8 6.155,22.979 6.343,23.315 6.343,23.748 18.994,23.748 19.002,23.74 19.002,6.999 5.9,6.999 5.896,7.993 5.748,8.291 5.69,8.403 5.619,8.559 5.558,8.675 5.326,8.834 5.174,8.941 5.155,8.929 -7.16,8.952 -7.16,11.082 4.924,11.082 5.879,11.513 6.343,12.501 6.343,17.517 6.155,18.317 5.779,18.693 5.659,18.813 4.928,18.981 4.928,19.024 2.577,19.024 2.577,19.784 2.273,19.784 2.273,17.312 2.271,17.31 -2.73,17.31 -2.73,19.781 -2.727,19.784 -3.031,19.784 -3.031,19.024 -6.066,19.03
no net on Layer0 "Default Coverlay 1 Top" (split plane): -11.083,8.953 -7.16,8.953 -7.16,11.073 -11.072,11.094 -11.083,11.083
no net on Layer0 "Default Coverlay 1 Top" (split plane): -9.861,19.059 -6.067,19.029 -6.067,21.287 -9.846,21.321 -9.861,21.306
no net on Layer0 "Default Coverlay 1 Top" (split plane): -4.282,11.915 5.571,11.915 5.571,17.31 -4.282,17.31
no net on Layer0 "Default Coverlay 1 Top" (split plane): 25.018,6.999 19.002,6.999 5.9,6.999 5.9,7 0,7 0,0 0.001,-0.001 25.018,-0.001
no net on Layer0 "Default Coverlay 1 Bottom" (split plane): -6.066,21.288 -4.153,21.282 -0.978,22.751 5.827,22.8 6.155,22.979 6.343,23.315 6.343,23.748 18.994,23.748 19.002,23.74 19.002,6.999 5.9,6.999 5.896,7.993 5.748,8.291 5.69,8.403 5.619,8.559 5.558,8.675 5.326,8.834 5.174,8.941 5.155,8.929 -7.16,8.952 -7.16,11.082 4.924,11.082 5.879,11.513 6.343,12.501 6.343,17.517 6.155,18.317 5.779,18.693 5.659,18.813 4.928,18.981 4.928,19.024 2.577,19.024 2.577,19.784 2.273,19.784 2.273,17.312 2.271,17.31 -2.73,17.31 -2.73,19.781 -2.727,19.784 -3.031,19.784 -3.031,19.024 -6.066,19.03
no net on Layer0 "Default Coverlay 1 Bottom" (split plane): -11.083,8.953 -7.16,8.953 -7.16,11.073 -11.072,11.094 -11.083,11.083
no net on Layer0 "Default Coverlay 1 Bottom" (split plane): -9.861,19.059 -6.067,19.029 -6.067,21.287 -9.846,21.321 -9.861,21.306
no net on Layer0 "Default Coverlay 1 Bottom" (split plane): -4.282,11.915 5.571,11.915 5.571,17.31 -4.282,17.31
no net on Layer0 "Default Coverlay 1 Bottom" (split plane): 25.018,6.999 19.002,6.999 5.9,6.999 5.9,7 0,7 0,0 0.001,-0.001 25.018,-0.001
GND on B.Cu "GND_L02_P007" (solid, pour order 7): 0.001,6.999 25.018,6.999 25.018,-0.001 25.017,0 0,0
VCC on F.Cu "VCC_L01_P006" (solid, pour order 6): -11.083,11.083 -11.025,11.025 19.015,11.025 19.015,7.012 19.002,6.999 25.018,6.999 25.018,-0.001 0.001,-0.001 0.001,6.999 0,7 5.9,7 5.9,7.989 5.442,8.447 5.442,8.755 5.36,8.755 5.162,8.953 -11.083,8.953

## Keep-outs
Edge.Cuts:
  circle w0.013: c-124.722,13.261 r0.355
  circle w0.013: c-137.855,1.266 r1
  circle w0.013: c-136.946,-8.867 r1
  lines w0.013: -131.237,2.412 -131.362,2.412 -131.612,2.412 -131.737,2.412 -139.014,2.412 -139.014,0.15 -122.392,0.15 -122.392,-7.803 -138.243,-7.803 -138.243,-9.947 -122.392,-9.947 -122.392,-12.256 -128.733,-12.256 -128.733,-19.256 -103.714,-19.256 -103.714,-12.256 -109.741,-12.256 -109.741,4.875 -122.392,4.875 -122.392,3.162 -125.737,3.162 -125.862,3.162 -126.237,3.162 -126.237,10.776 ; -131.237,2.417 -131.237,10.777 ; -133.472,10.777 -133.472,16.276 -123.874,16.276 -123.874,10.777 -133.472,10.777 ; -133.27,11.858 -133.24,11.964 -133.174,12.052 -133.08,12.11 -132.972,12.131 -132.472,12.131 -132.416,12.126 -132.314,12.086 -132.232,12.011 -132.183,11.913 -132.173,11.803 -132.203,11.697 -132.269,11.609 -132.363,11.551 -132.472,11.531 -132.972,11.531 -133.027,11.536 -133.129,11.576 -133.211,11.65 -133.26,11.749 -133.27,11.858 ; -133.27,14.718 -133.24,14.824 -133.174,14.912 -133.08,14.97 -132.972,14.991 -132.472,14.991 -132.416,14.986 -132.314,14.946 -132.232,14.871 -132.183,14.773 -132.173,14.663 -132.203,14.557 -132.269,14.469 -132.363,14.411 -132.472,14.391 -132.972,14.391 -133.027,14.396 -133.129,14.436 -133.211,14.51 -133.26,14.609 -133.27,14.718 ; -133.227,13.261 -133.209,13.37 -133.159,13.469 -133.08,13.548 -132.981,13.598 -132.872,13.616 -132.572,13.616 -132.462,13.598 -132.363,13.548 -132.284,13.469 -132.234,13.37 -132.217,13.261 -132.234,13.151 -132.284,13.052 -132.363,12.973 -132.462,12.923 -132.572,12.906 -132.872,12.906 -132.981,12.923 -133.08,12.973 -133.159,13.052 -133.209,13.151 -133.227,13.261 ; -125.27,11.858 -125.24,11.964 -125.174,12.052 -125.08,12.11 -124.972,12.131 -124.472,12.131 -124.416,12.126 -124.314,12.086 -124.232,12.011 -124.183,11.913 -124.173,11.803 -124.203,11.697 -124.269,11.609 -124.363,11.551 -124.472,11.531 -124.972,11.531 -125.027,11.536 -125.129,11.576 -125.211,11.65 -125.26,11.749 -125.27,11.858 ; -125.27,14.718 -125.24,14.824 -125.174,14.912 -125.08,14.97 -124.972,14.991 -124.472,14.991 -124.416,14.986 -124.314,14.946 -124.232,14.871 -124.183,14.773 -124.173,14.663 -124.203,14.557 -124.269,14.469 -124.363,14.411 -124.472,14.391 -124.972,14.391 -125.027,14.396 -125.129,14.436 -125.211,14.51 -125.26,14.609 -125.27,14.718

## Other copper
F.Cu:
  region net VCC: -9.544,10.001 ccw(c-8.544,10.001) -8.544,9.001 ccw(c-8.544,10.001) -7.544,10.001 ccw(c-8.544,10.001) -8.544,11.001 ccw(c-8.544,10.001)
  region net j4: -9.544,20.223 ccw(c-8.544,20.223) -8.544,19.223 ccw(c-8.544,20.223) -7.544,20.223 ccw(c-8.544,20.223) -8.544,21.223 ccw(c-8.544,20.223)

## Silkscreen, mask and mechanical layers (free items; w line width, h text height)
User.9:
  circle w0.013: c-8.544,10.001 r1
  circle w0.013: c-8.544,20.223 r1
  lines w0.013: -2.73,17.31 -4.282,17.31 -4.282,11.915 5.571,11.915 5.571,17.31 2.27,17.31 ; -2.727,17.312 -2.727,19.784 -3.031,19.784 -3.031,19.024 -4.774,19.024 ; -2.727,18.945 2.273,18.945 ; -2.727,19.632 2.273,19.632 ; 2.273,17.312 2.273,19.784 2.577,19.784 2.577,19.024 4.928,19.024 4.928,18.981 5.655,18.817 5.896,18.576 6.155,18.317 6.343,17.551 6.343,12.501 5.896,11.52 4.928,11.091 4.928,11.073 -5.994,11.073 ; 5.9,7 0,7 0,0 25.018,-0.001 25.018,6.999 19,6.999 ; 5.903,7 5.896,7.994 ; 19.002,6.999 18.994,8.085 ; -6.692,8.932 -6.682,11.074 ; -6.692,8.932 -6.004,8.931 ; -6.692,8.932 -11.084,8.952 -11.074,11.094 -6.682,11.074 ; -6.682,11.074 -5.994,11.073 ; -6.004,8.931 -5.994,11.073 ; -6.004,8.931 5.158,8.931 5.174,8.941 5.555,8.679 ; -5.462,19.025 -5.447,21.287 ; -5.462,19.025 -4.774,19.024 ; -5.462,19.025 -9.854,19.054 -9.839,21.316 -5.447,21.287 ; -5.447,21.287 -4.759,21.286 ; -4.774,19.024 -4.759,21.286 ; -4.759,21.286 -4.149,21.286 -3.019,21.804 -3.015,21.81 -0.978,22.751 3.682,22.791 5.819,22.791 6.155,22.979 6.343,23.316 6.343,23.748 18.994,23.748 18.994,8.772 ; -2.469,12.394 cw(c-2.457,13.724) -3.787,13.735 -3.783,14.235 -3.781,14.485 cw(c-2.451,14.474) -2.44,15.804 3.84,15.752 cw(c3.829,14.422) 5.159,14.41 5.156,14.16 5.152,13.661 ; -2.469,12.394 3.811,12.342 ; -2.469,12.394 -2.467,12.544 3.812,12.492 ; -2.469,12.394 3.811,12.342 ; 3.811,12.342 ccw(c3.822,13.672) 5.152,13.661 ; 3.811,12.342 3.812,12.492 ; 3.811,12.342 3.812,12.492 ; 3.812,12.492 ccw(c3.822,13.672) 5.002,13.662 5.152,13.661 ; 5.555,8.679 18.994,8.772 ; 5.555,8.679 5.896,7.994 ; 5.896,7.994 18.994,8.085 ; 18.994,8.772 18.994,8.085 ; -3.937,13.737 ccw(c-2.457,13.724) -2.47,12.244 3.81,12.192 ccw(c3.822,13.672) 5.302,13.659 5.306,14.159 5.309,14.409 ccw(c3.829,14.422) 3.841,15.902 -2.439,15.954 ccw(c-2.451,14.474) -3.931,14.487 -3.933,14.237 -3.937,13.737